# Allegro board SDHCAL_DAQ_2V0.brd
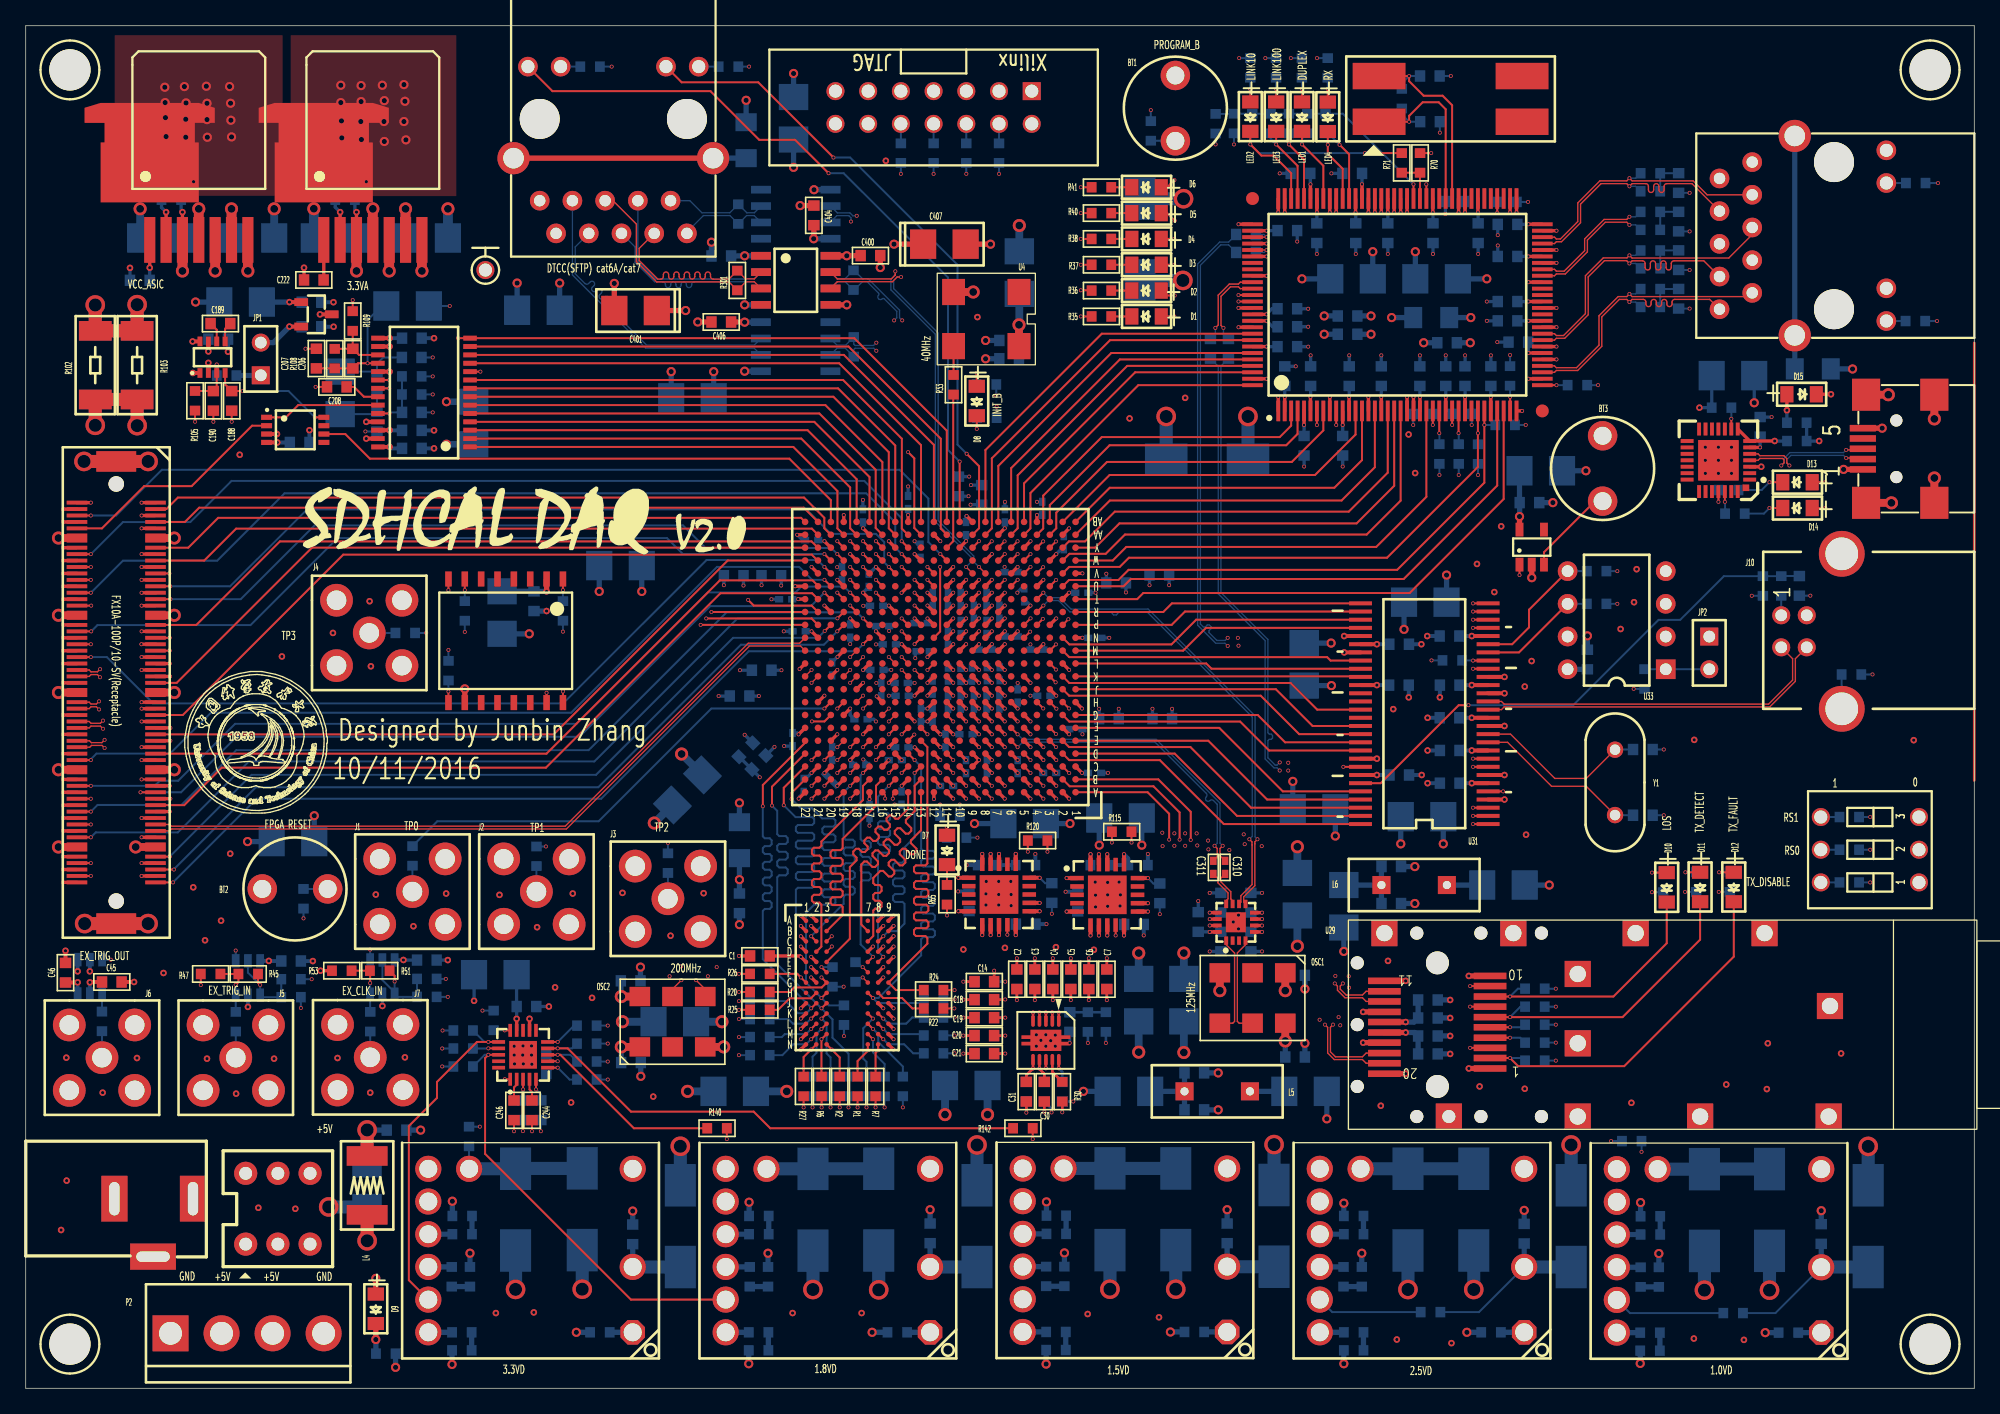
[diagram p0: board, top side]
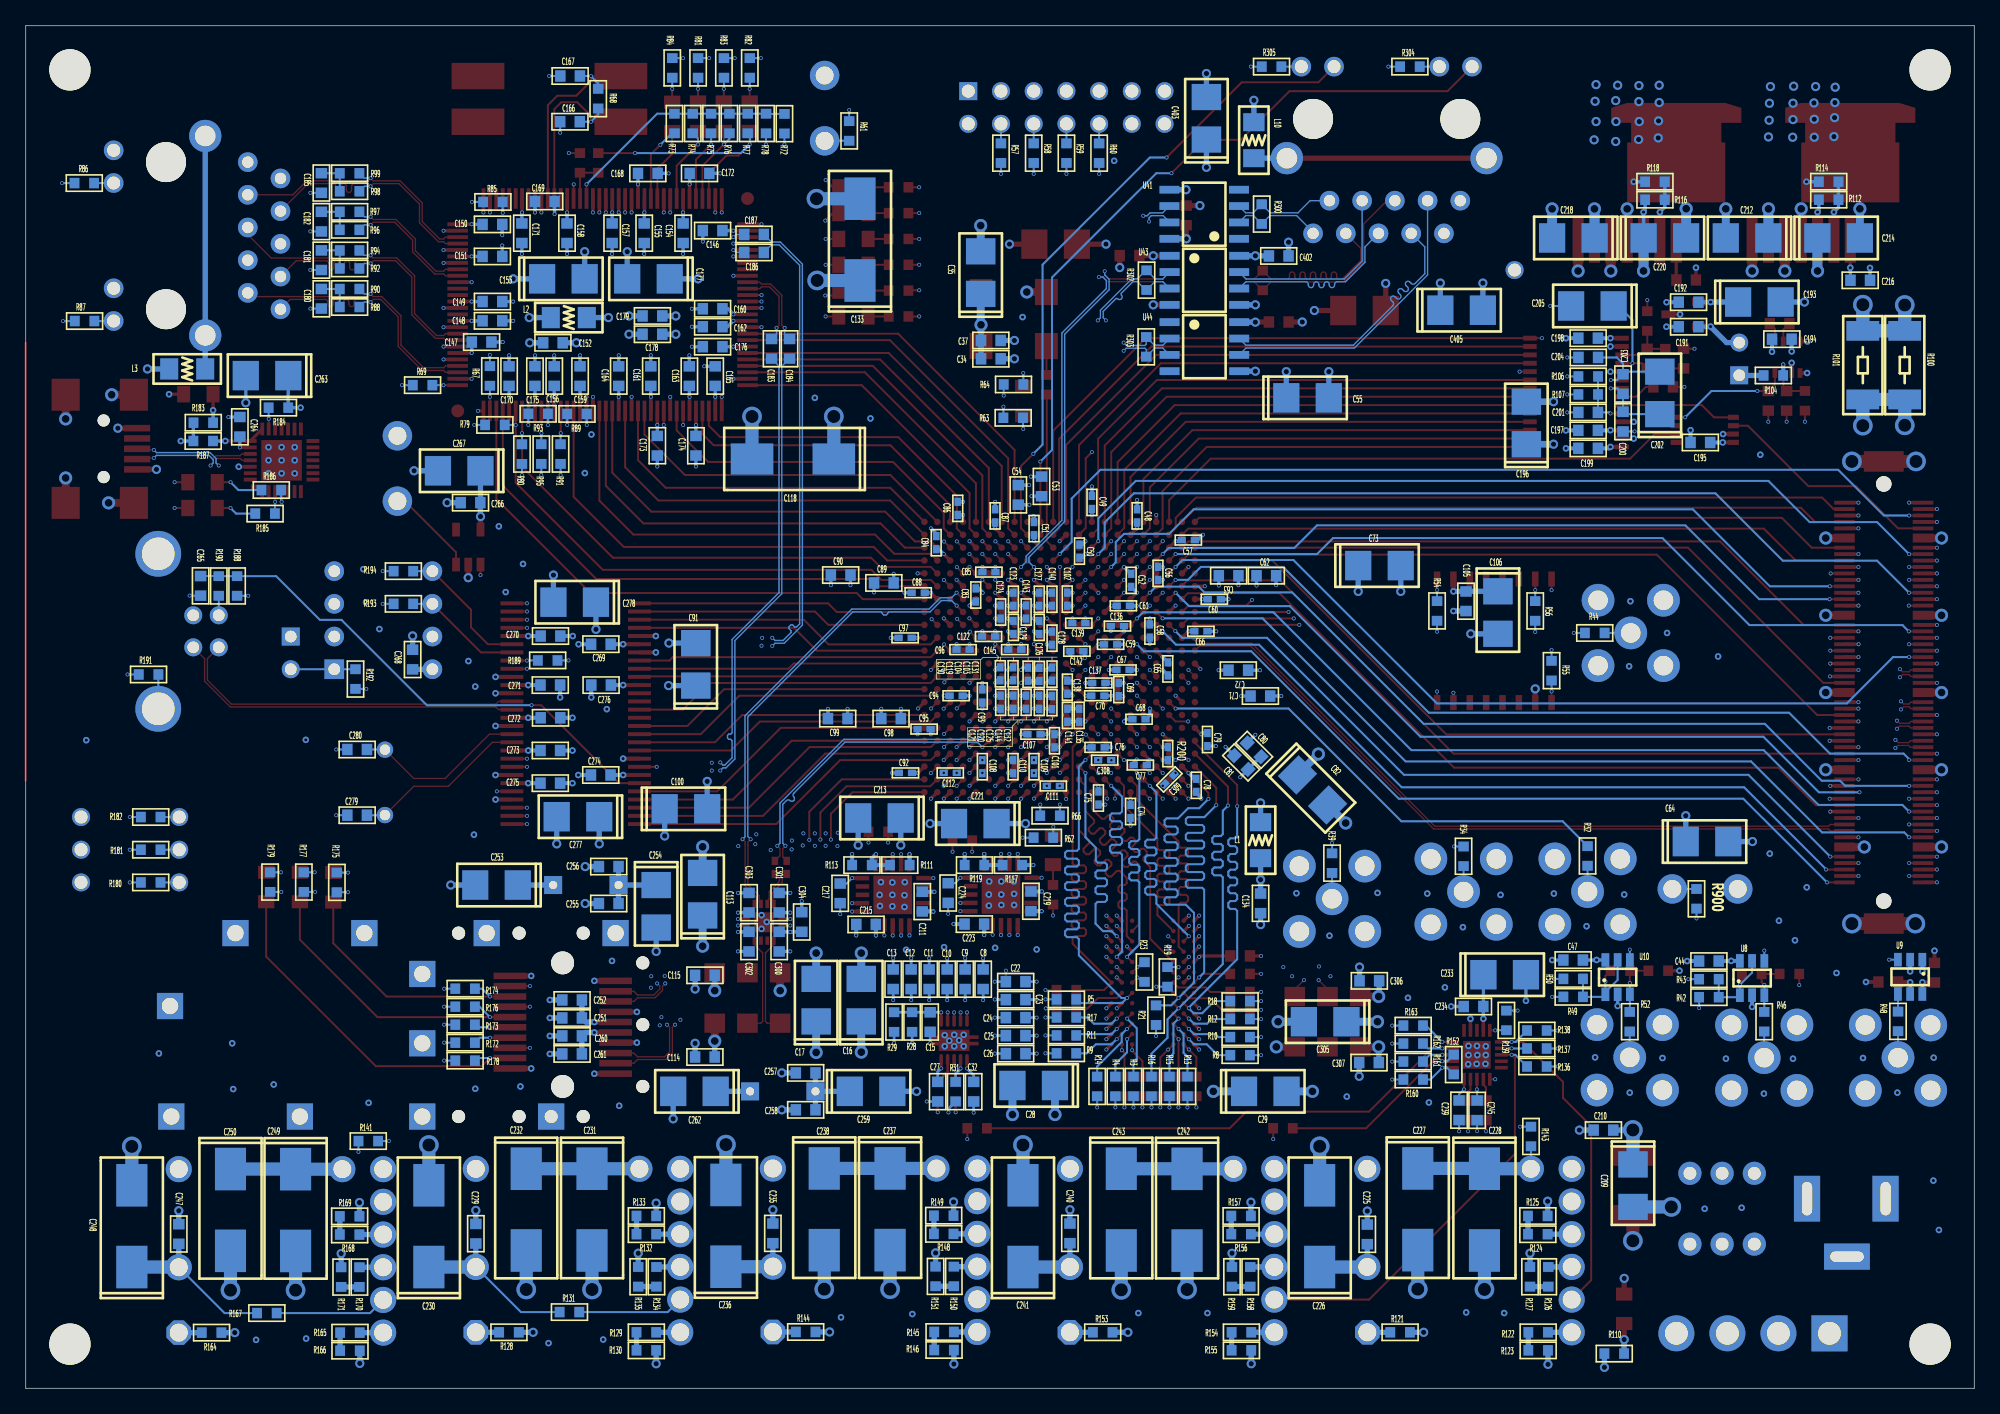
[diagram p1: board, bottom side, seen from below]

Outline 151.28 x 105.84 mm; copper layers: TOP, GND1, POWER1, SIG1, GND2, POWER2, SIG2, POWER3, GND3, BOTTOM. Coordinates in mm from the lower left corner of the outline.
Outline path: 0,105.84 0,0 151.28,0 151.28,105.84 0,105.84

## Design rules (mm)
net group CK_5: nets CK_5N CK_5P
net group CK_40: nets CK_40N CK_40P
net group CLK_125M: nets CLK_125M_N CLK_125M_P
net group CLK_200M: nets CLK_200M_N CLK_200M_P
net group CLKLINE: nets DDR3_CK DDR3_DQS
net group DP2: nets N18412 N18416
net group DP3: nets N18388 N18400
net group DP4: nets N16860005 N16860014
net group DP5: nets XTALIN XTALOUT
net group DP6: nets N02792 N02796
net group DP7: nets N00321 N00325
net group DP12: nets N16839379 N16839380
net group DP13: nets N16859991 N16859996
net group DP14: nets N16859977 N16859986
net group DP15: nets N16859959 N16859968
net group DTCC_CLK: nets DTCC_CLK_N DTCC_CLK_P
net group DTCC_CLKB: nets DTCC_CLKB_N DTCC_CLKB_P
net group DTCC_DATA: nets DTCC_DATA_N DTCC_DATA_P
net group DTCC_TRG: nets DTCC_TRG_N DTCC_TRG_P
net group PHY_MDI_0: nets PHY_MDI_0_N PHY_MDI_0_P
net group PHY_MDI_1: nets PHY_MDI_1_N PHY_MDI_1_P
net group PHY_MDI_2: nets PHY_MDI_2_N PHY_MDI_2_P
net group PHY_MDI_3: nets PHY_MDI_3_N PHY_MDI_3_P
net group RAZ_CHN: nets RAZ_CHNN RAZ_CHNP
net group SFP_CLK: nets SFP_CLK_N SFP_CLK_P
net group SFP_RX: nets SFP_RXN SFP_RXP
net group SFP_TX: nets SFP_TXN SFP_TXP
net group SGMII_RX: nets SGMII_RX+ SGMII_RX-
net group SGMII_TX: nets SGMII_TX+ SGMII_TX-
net group SPARE_DIFF: nets SPARE2 SPARE3
net group SPF_CLK_1: nets N16928130 N16928133
net group VAL_EVT: nets VAL_EVTN VAL_EVTP
net group ADDRCNTRL: nets DDR3_A0 DDR3_A1 DDR3_A2 DDR3_A3 DDR3_A4 DDR3_A5 DDR3_A6 DDR3_A7 DDR3_A8 DDR3_A9 DDR3_A10 DDR3_A11 DDR3_A12 DDR3_A13 DDR3_A14 DDR3_BA0 DDR3_BA1 DDR3_BA2 DDR3_CAS# DDR3_CK# DDR3_CKE DDR3_ODT DDR3_RAS# DDR3_RESET# DDR3_WE#
net group BYTELANE: nets DDR3_DM DDR3_DQ0 DDR3_DQ1 DDR3_DQ2 DDR3_DQ3 DDR3_DQ4 DDR3_DQ5 DDR3_DQ6 DDR3_DQ7 DDR3_DQS#
net group PHY_RXD: nets PHY_RXD0 PHY_RXD1 PHY_RXD2 PHY_RXD3 PHY_RXD4 PHY_RXD5 PHY_RXD6 PHY_RXD7
net group PHY_TXD: nets PHY_TXD0 PHY_TXD1 PHY_TXD2 PHY_TXD3 PHY_TXD4 PHY_TXD5 PHY_TXD6 PHY_TXD7

## Placement (name value [footprint] x y rotation side)
BT1  Button  [INDC2-200-M]  89.26 99.44 270 top
BT2  Button  [INDC2-200-M]  20.9 38.79 180 top
BT3  Button  [INDC2-200-M]  122.43 71.45 90 top
C1  0.1u  [SC0603]  57 33.58 0 top
C2  0.1u  [SC0603]  76.95 31.77 90 top
C3  0.1u  [SC0603]  78.35 31.77 90 top
C4  0.1u  [SC0603]  79.74 31.77 90 top
C5  0.1u  [SC0603]  81.14 31.77 90 top
C6  0.1u  [SC0603]  82.54 31.77 90 top
C7  0.1u  [SC0603]  83.93 31.77 90 top
C8  0.1u  [SC0603]  76.95 31.77 90 bottom
C9  0.1u  [SC0603]  78.35 31.77 90 bottom
C10  0.1u  [SC0603]  79.74 31.77 90 bottom
C11  0.1u  [SC0603]  81.14 31.77 90 bottom
C12  0.1u  [SC0603]  82.54 31.77 90 bottom
C13  0.1u  [SC0603]  83.93 31.77 90 bottom
C14  0.1u  [SC0603]  74.42 31.58 180 top
C15  0.01u  [SC0603]  81.06 28.45 90 bottom
C16  10u  [STC3528]  86.41 30.15 90 bottom
C17  10u  [STC3528]  89.92 30.15 90 bottom
C18  0.1u  [SC0603]  74.42 30.19 180 top
C19  0.1u  [SC0603]  74.42 28.79 180 top
C20  0.1u  [SC0603]  74.42 27.39 180 top
C21  0.1u  [SC0603]  74.42 26 180 top
C22  0.1u  [SC0603]  74.42 31.58 180 bottom
C23  0.1u  [SC0603]  74.42 30.19 180 bottom
C24  0.1u  [SC0603]  74.42 28.79 180 bottom
C25  0.1u  [SC0603]  74.42 27.39 180 bottom
C26  0.1u  [SC0603]  74.42 26 180 bottom
C27  4.7u  [SC0603]  80.48 23.04 270 bottom
C28  10u  [STC3528]  73.02 23.52 0 bottom
C29  10u  [STC3528]  55.04 23.06 180 bottom
C30  4.7u  [SC0603]  79.08 23.04 270 top
C31  0.1u  [SC0603]  77.69 23.04 270 top
C32  4.7u  [SC0603]  77.69 23.04 270 bottom
C34  1u  [SC0603]  76.35 79.97 180 bottom
C35  10u  [STC3528]  77.14 86.66 90 bottom
C37  0.1u  [SC0603]  76.35 81.39 180 bottom
C44  0.1u  [SC0603]  20.6 33.19 180 bottom
C45  0.1u  [SC0603]  6.68 31.56 180 top
C46  0.1u  [SC0603]  3.09 32.28 90 top
C47  0.1u  [SC0603]  31.14 33.26 180 bottom
C48  0.47u  [SC0402]  65 67.77 90 bottom
C49  0.47u  [SC0402]  68.5 68.81 90 bottom
C50  0.47u  [SC0402]  69.47 65.03 90 bottom
C51  0.47u  [SC0402]  73 66.78 90 bottom
C52  0.47u  [SC0402]  65.46 62.76 270 bottom
C53  4.7u  [SC0603]  72.42 70.06 90 bottom
C54  4.7u  [SC0603]  74.22 69.4 90 bottom
C55  47u  [STC3528]  51.76 76.94 180 bottom
C56  0.47u  [SC0402]  63.37 63.3 90 bottom
C57  0.47u  [SC0402]  61.02 65.89 180 bottom
C58  0.47u  [SC0402]  64.01 58.82 270 bottom
C59  0.47u  [SC0402]  67.05 57.78 180 bottom
C60  0.47u  [SC0402]  59 61.29 180 bottom
C61  0.47u  [SC0402]  66.06 60.78 180 bottom
C62  4.7u  [SC0603]  54.96 63.12 180 bottom
C63  4.7u  [SC0603]  57.89 63.12 0 bottom
C64  47u  [STC3528]  20.75 42.47 180 bottom
C65  0.47u  [SC0402]  62.61 55.88 90 bottom
C66  0.47u  [SC0402]  60.05 58.8 180 bottom
C67  0.47u  [SC0402]  66.09 55.8 0 bottom
C68  0.47u  [SC0402]  64.85 51.97 0 bottom
C69  0.47u  [SC0402]  66.42 54.28 90 bottom
C70  0.47u  [SC0402]  68.05 53.8 180 bottom
C71  4.7u  [SC0603]  55.42 53.77 180 bottom
C72  4.7u  [SC0603]  57.14 55.78 180 bottom
C73  47u  [STC3528]  46.18 63.91 180 bottom
C74  0.47u  [SC0402]  65.51 44.81 270 bottom
C75  0.47u  [SC0402]  68 45.85 270 bottom
C76  0.47u  [SC0402]  68.02 49.78 0 bottom
C77  0.47u  [SC0402]  64.74 48.41 0 bottom
C78  0.47u  [SC0402]  60.4 46.84 270 bottom
C79  0.47u  [SC0402]  59.54 50.39 270 bottom
C80  4.7u  [SC0603]  55.91 49.59 225 bottom
C81  4.7u  [SC0603]  56.92 48.61 225 bottom
C82  47u  [STC3528]  51.37 46.48 225 bottom
C83  0.47u  [SC0402]  77.52 61.62 90 bottom
C84  0.47u  [SC0402]  80.59 65.68 90 bottom
C85  0.47u  [SC0402]  76.5 63.4 180 bottom
C86  0.47u  [SC0402]  78.92 68.35 90 bottom
C87  0.47u  [SC0402]  76.02 67.77 90 bottom
C88  0.47u  [SC0402]  81.99 61.8 0 bottom
C89  4.7u  [SC0603]  84.66 62.56 0 bottom
C90  4.7u  [SC0603]  88.01 63.17 0 bottom
C91  47u  [STC3528]  99.26 56.24 90 bottom
C92  0.47u  [SC0402]  82.98 47.8 0 bottom
C93  0.47u  [SC0402]  77.01 53.77 90 bottom
C94  0.47u  [SC0402]  79.04 53.8 180 bottom
C95  0.47u  [SC0402]  81.53 51.21 0 bottom
C96  0.47u  [SC0402]  78.51 57.38 180 bottom
C97  0.47u  [SC0402]  83.01 58.29 0 bottom
C98  4.7u  [SC0603]  84.1 52.02 0 bottom
C99  4.7u  [SC0603]  88.24 52.02 0 bottom
C100  47u  [STC3528]  100.03 45.01 180 bottom
C101  0.47u  [SC0402]  71.41 50.3 270 bottom
C102  47u  [SC0402]  70.42 61.3 270 bottom
C103  0.1u  [SC0402]  72.58 55.45 90 bottom
C104  0.47u  [SC0402]  73.47 55.47 90 bottom
C105  0.1u  [SC0603]  39.46 61.14 270 bottom
C106  10uF  [STC3528]  36.98 60.26 270 bottom
C107  4.7u  [SC0402]  73 50.8 180 bottom
C108  0.1u  [SC0402]  77.01 48.29 270 bottom
C109  0.1u  [SC0402]  73 48.29 270 bottom
C110  4.7u  [SC0402]  74.63 48.29 90 bottom
C111  0.1u  [SC0402]  71.5 46.79 180 bottom
C112  0.1u  [SC0402]  79.5 47.8 0 bottom
C113  10u  [STC3528]  98.73 38.38 90 bottom
C114  0.01u  [SC0603]  98.55 25.73 180 bottom
C115  0.1u  [SC0603]  98.55 32.08 180 bottom
C118  300u  [STC7343]  91.72 72.19 0 bottom
C119  4.7u  [SC0402]  74.63 55.5 90 bottom
C120  4.7u  [SC0402]  74.6 53.29 90 bottom
C121  4.7u  [SC0402]  75.59 53.29 270 bottom
C122  4.7u  [SC0402]  76.53 58.39 0 bottom
C123  4.7u  [SC0402]  74.6 61.29 270 bottom
C124  4.7u  [SC0402]  75.59 60.3 270 bottom
C125  0.47u  [SC0402]  73.61 53.29 270 bottom
C126  0.47u  [SC0402]  72.59 59.11 270 bottom
C127  0.47u  [SC0402]  72.59 61.29 270 bottom
C128  0.47u  [SC0402]  71.6 58.27 270 bottom
C129  0.47u  [SC0402]  74.6 59.11 270 bottom
C130  0.47u  [SC0402]  75.62 55.5 270 bottom
C131  0.47u  [SC0402]  71.6 55.47 270 bottom
C132  0.47u  [SC0402]  71.6 53.26 270 bottom
C133  100u  [STC7343]  86.51 89.23 90 bottom
C134  47u  [SC0603]  55.41 37.67 270 bottom
C135  4.7u  [SC0402]  69.49 52.27 270 bottom
C136  4.7u  [SC0402]  66.52 59.21 180 bottom
C137  4.7u  [SC0402]  67.97 54.79 180 bottom
C138  0.47u  [SC0402]  70.41 54.46 270 bottom
C139  0.47u  [SC0402]  69.52 59.44 180 bottom
C140  0.47u  [SC0402]  71.6 61.29 90 bottom
C141  0.47u  [SC0402]  70.41 52.27 270 bottom
C142  0.47u  [SC0402]  69.67 57.25 180 bottom
C143  0.47u  [SC0402]  73.61 60.3 270 bottom
C144  0.47u  [SC0402]  72.59 53.28 90 bottom
C145  0.47u  [SC0402]  74.5 57.38 180 bottom
C146  0.1u  [SC0603]  97.95 89.93 0 bottom
C147  0.1u  [SC0603]  115.89 81.27 180 bottom
C148  0.1u  [SC0603]  115.05 82.92 180 bottom
C149  0.1u  [SC0603]  115.05 84.42 180 bottom
C150  0.1u  [SC0603]  115.05 90.41 180 bottom
C151  0.1u  [SC0603]  115.05 87.92 180 bottom
C152  1n  [SC0603]  110.35 81.22 180 bottom
C153  10u  [STC3528]  109.54 86.18 180 bottom
C154  0.1u  [SC0603]  100.24 89.73 270 bottom
C155  0.1u  [SC0603]  103.26 89.73 270 bottom
C156  0.1u  [SC0603]  110.25 78.62 90 bottom
C157  0.1u  [SC0603]  105.75 89.73 270 bottom
C158  0.1u  [SC0603]  109.26 89.73 270 bottom
C159  0.1u  [SC0603]  108.24 78.62 90 bottom
C160  0.1u  [SC0603]  97.95 83.86 0 bottom
C161  0.1u  [SC0603]  102.76 78.62 90 bottom
C162  0.1u  [SC0603]  97.95 82.46 0 bottom
C163  0.1u  [SC0603]  99.76 78.62 90 bottom
C164  0.1u  [SC0603]  105.24 78.62 90 bottom
C165  0.1u  [SC0603]  97.75 78.62 90 bottom
C166  22p  [SC0603]  109.03 98.39 0 bottom
C167  22p  [SC0603]  109.02 101.94 0 bottom
C168  0.1u  [SC0603]  102.99 94.37 180 bottom
C169  0.1u  [SC0603]  110.99 92.19 180 bottom
C170  0.1u  [SC0603]  113.75 78.62 90 bottom
C171  0.1u  [SC0603]  112.76 89.73 270 bottom
C172  0.1u  [SC0603]  98.97 94.37 180 bottom
C173  0.1u  [SC0603]  102.25 73.22 270 bottom
C174  0.1u  [SC0603]  99.25 73.22 270 bottom
C175  0.1u  [SC0603]  111.75 78.62 90 bottom
C176  0.1u  [SC0603]  97.95 80.91 0 bottom
C177  10u  [STC3528]  102.93 86.18 0 bottom
C178  1n  [SC0603]  102.63 81.88 0 bottom
C179  1n  [SC0603]  102.63 83.3 0 bottom
C180  0.01u  [SC0603]  128.33 84.63 270 bottom
C181  0.01u  [SC0603]  128.33 87.63 270 bottom
C182  0.01u  [SC0603]  128.33 90.63 270 bottom
C183  0.01u  [SC0603]  93.38 80.75 270 bottom
C184  0.01u  [SC0603]  91.98 80.75 270 bottom
C185  0.01u  [SC0603]  128.33 93.62 270 bottom
C186  0.01u  [SC0603]  94.74 88.23 180 bottom
C187  0.01u  [SC0603]  94.74 89.63 180 bottom
C188  39n  [SC0603]  15.99 76.7 270 top
C189  680p  [SC0603]  15.11 82.7 0 top
C190  0.1u  [SC0603]  14.57 76.7 270 top
C191  0.1u  [SC0603]  22.18 82.46 0 bottom
C192  0.47u  [SC0603]  22.18 84.37 0 bottom
C193  10u  [STC3528]  16.68 84.38 180 bottom
C194  0.1u  [SC0603]  14.94 81.5 0 bottom
C195  0.1u  [SC0603]  21.27 73.47 0 bottom
C196  10u  [STC3528]  34.77 74.99 90 bottom
C197  0.1u  [SC0603]  29.98 74.41 0 bottom
C198  0.1u  [SC0603]  29.98 81.57 0 bottom
C199  0.1u  [SC0603]  29.98 73.01 0 bottom
C200  0.1u  [SC0603]  27.27 75.09 90 bottom
C201  0.1u  [SC0603]  29.98 75.81 0 bottom
C202  10u  [STC3528]  24.41 77.32 90 bottom
C203  0.1u  [SC0603]  27.27 78.01 90 bottom
C204  0.1u  [SC0603]  29.97 80.07 180 bottom
C205  10u  [STC3528]  29.65 84.07 0 bottom
C206  x  [SC0603]  25.4 79.98 90 top
C207  0.1u  [SC0603]  22.57 79.99 90 top
C208  0.1u  [SC0603]  24.15 77.79 180 top
C209  10u  [STC3528]  26.49 15.74 270 bottom
C210  0.1u  [SC0603]  28.79 20.05 0 bottom
C211  1u  [SC0603]  81.67 37.81 90 bottom
C212  10u  [STC3528]  17.64 89.36 0 bottom
C213  10u  [STC3528]  85 44.3 0 bottom
C214  10u  [STC3528]  10.53 89.36 180 bottom
C215  1u  [SC0603]  86.04 36.03 0 bottom
C216  470p  [SC0603]  8.85 86.07 180 bottom
C217  470p  [SC0603]  88.05 38.44 270 bottom
C218  10u  [STC3528]  31.13 89.36 0 bottom
C219  1u  [SC0603]  73.24 37.83 90 bottom
C220  10u  [STC3528]  24.02 89.36 180 bottom
C221  10u  [STC3528]  77.56 43.87 0 bottom
C222  470p  [SC0603]  22.37 86.09 180 top
C223  1u  [SC0603]  77.63 36.06 0 bottom
C224  1n  [SC0603]  79.67 38.47 270 bottom
C225  22u  [SC0603]  47.12 11.96 90 bottom
C226  330u  [STC7343]  50.82 12.59 90 bottom
C227  100u  [STC7343]  43.21 13.9 270 bottom
C228  150u  [STC7343]  38.03 13.88 270 bottom
C229  22u  [SC0603]  116.34 12.01 90 bottom
C230  330u  [STC7343]  119.98 12.59 90 bottom
C231  100u  [STC7343]  107.31 13.88 270 bottom
C232  150u  [STC7343]  112.43 13.88 270 bottom
C233  10u  [STC3528]  36.46 32.13 180 bottom
C234  0.1u  [SC0603]  38.88 29.65 0 bottom
C235  22u  [SC0603]  93.28 12.03 90 bottom
C236  330u  [STC7343]  96.92 12.62 90 bottom
C237  100u  [STC7343]  84.18 13.9 270 bottom
C238  150u  [STC7343]  89.29 13.9 270 bottom
C239  22n  [SC0603]  40 21.6 270 bottom
C240  22u  [SC0603]  70.21 12.03 90 bottom
C241  330u  [STC7343]  73.86 12.59 90 bottom
C242  100u  [STC7343]  61.12 13.87 270 bottom
C243  150u  [STC7343]  66.22 13.88 270 bottom
C244  22n  [SC0603]  39.3 21.59 270 top
C245  22n  [SC0603]  38.6 21.59 270 bottom
C246  22n  [SC0603]  37.91 21.59 270 top
C247  22u  [SC0603]  139.4 11.98 90 bottom
C248  330u  [STC7343]  143.05 12.59 90 bottom
C249  100u  [STC7343]  130.33 13.84 270 bottom
C250  150u  [STC7343]  135.39 13.85 270 bottom
C251  0.1u  [SC0603]  108.86 28.77 0 bottom
C252  0.1u  [SC0603]  108.86 30.16 0 bottom
C253  10u  [STC3528]  114.73 39.09 0 bottom
C254  10u  [STC3528]  102.34 37.44 270 bottom
C255  0.1u  [SC0603]  106.02 37.66 0 bottom
C256  0.1u  [SC0603]  106.02 40.53 0 bottom
C257  0.1u  [SC0603]  90.73 24.5 0 bottom
C258  0.1u  [SC0603]  90.73 21.63 0 bottom
C259  10u  [STC3528]  85.65 23.06 180 bottom
C260  0.1u  [SC0603]  108.86 27.37 0 bottom
C261  0.1u  [SC0603]  108.86 25.97 0 bottom
C262  10u  [STC3528]  99.36 23.06 0 bottom
C263  10u  [STC3528]  132.55 78.66 0 bottom
C264  1u  [SC0603]  134.66 74.69 90 bottom
C265  0.1u  [SC0603]  137.71 62.33 90 bottom
C266  0.1u  [SC0603]  116.75 68.8 0 bottom
C267  10u  [STC3528]  117.63 71.27 0 bottom
C268  0.1u  [SC0603]  121.25 56.61 270 bottom
C269  0.1u  [SC0603]  106.63 57.8 0 bottom
C270  0.1u  [SC0603]  110.54 58.43 180 bottom
C271  0.1u  [SC0603]  110.56 54.62 180 bottom
C272  0.1u  [SC0603]  110.54 52.08 180 bottom
C273  0.1u  [SC0603]  110.56 49.54 180 bottom
C274  0.1u  [SC0603]  106.64 47.64 0 bottom
C275  0.1u  [SC0603]  110.56 47 180 bottom
C276  0.1u  [SC0603]  106.61 54.62 0 bottom
C277  10u  [STC3528]  108.41 44.4 0 bottom
C278  10u  [STC3528]  108.66 61.06 0 bottom
C279  12p  [SC0603]  125.55 44.51 180 bottom
C280  12p  [SC0603]  125.55 49.62 180 bottom
C300  0.01u  [SC0603]  92.79 34.7 270 bottom
C301  0.01u  [SC0603]  92.79 37.72 90 bottom
C302  0.01u  [SC0603]  95.12 34.7 270 bottom
C303  0.01u  [SC0603]  95.12 37.72 90 bottom
C304  0.1u  [SC0603]  91.03 36.22 90 bottom
C305  10u  [STC3528]  50.39 28.47 0 bottom
C306  0.1u  [SC0603]  46.96 31.65 180 bottom
C307  0.01u  [SC0603]  46.99 25.3 180 bottom
C308  0.01u  [SC0402]  67.51 48.79 180 bottom
C309  0.01u  [SC0402]  62.49 47.3 315 bottom
C310  0.1u  [SC0402]  93.12 40.46 270 top
C311  0.1u  [SC0402]  92.2 40.46 270 top
C400  0.1u  [SC0603]  65.58 87.99 0 top
C401  10u  [STC3528]  47.35 83.72 180 top
C402  0.1u  [SC0603]  54 87.96 180 bottom
C403  10u  [STC3528]  59.61 98.65 90 bottom
C404  0.1u  [SC0603]  61.19 91.11 90 top
C405  10u  [STC3528]  39.8 83.74 180 bottom
C406  0.1u  [SC0603]  54 82.83 180 top
C407  10u  [STC3528]  71.32 88.87 0 top
D1  LED  [SD0805]  87.02 83.26 180 top
D2  LED  [SD0805]  87.02 85.27 180 top
D3  LED  [SD0805]  87.02 87.27 180 top
D4  LED  [SD0805]  87.02 89.28 180 top
D5  LED  [SD0805]  87.02 91.29 180 top
D6  LED  [SD0805]  87.02 93.29 180 top
D7  LED  [SD0805]  71.53 41.82 270 top
D8  LED  [SD0805]  73.84 76.69 270 top
D9  Green  [SD0805]  27.18 6.17 270 top
D10  LED  [SD0805]  127.41 38.91 270 top
D11  LED  [SD0805]  130 38.94 270 top
D12  LED  [SD0805]  132.61 38.94 270 top
D13  LED  [SD0805]  137.56 70.38 180 top
D14  LED  [SD0805]  137.56 68.38 180 top
D15  LED  [SD0805]  137.88 77.22 0 top
J1  LEMO  [CON-BNC-S-T]  30.02 38.58 0 top
J2  LEMO  [CON-BNC-S-T]  39.65 38.58 0 top
J3  LEMO  [CON-BNC-S-T]  49.86 38.02 0 top
J4  LEMO  [CON-BNC-S-T]  26.67 58.67 0 top
J5  LEMO  [CON-BNC-S-T]  16.31 25.68 270 top
J6  LEMO  [CON-BNC-S-T]  5.92 25.68 270 top
J7  LEMO  [CON-BNC-S-T]  26.75 25.71 270 top
J8  JTAG-14pin  [JTAG-14P]  83.24 103.99 180 top
J9  MINI USB  [CONN_USB_B]  146.68 72.98 90 top
J10  USB_B  [MJ4-SR-1]  136.3 60.05 90 top
JP1  Jump wire  [SIP-2P]  18.25 79.96 90 top
JP2  Jump wire  [SIP-2P]  130.71 57.12 270 top
L1  bead  [SL1206]  55.41 42.57 90 bottom
L2  FERRITE-220  [SL1206]  109.12 83.17 180 bottom
L3  FERRITE-220  [SL1206]  138.75 79.18 0 bottom
L4  10uH  [SL1812]  26.5 15.76 90 top
L5  39mH  [BL02RN2R1M2B]  92.51 23.06 0 top
L6  39mH  [BL02RN2R1M2B]  107.8 39.09 0 top
L10  FERRITE-220  [SL1206]  55.93 96.95 90 bottom
LED1  Green  [SD0805]  99.09 98.78 270 top
LED2  Green  [SD0805]  95.08 98.78 270 top
LED3  Green  [SD0805]  97.08 98.78 270 top
LED4  Green  [SD0805]  101.09 98.77 270 top
NOREF  -  []  137.13 55.63 0 top
NOREF#2  -  []  67.59 84 0 top
NOREF#3  -  []  91.26 46.58 0 top
NOREF#4  -  []  123.62 87.81 0 top
NOREF#5  -  []  123.93 87.58 0 top
NOREF#6  -  []  102.84 25.55 0 top
NOREF#7  -  []  19.96 63.53 0 top
NOREF#8  -  []  42.44 88.29 0 top
NOREF#9  -  []  101.04 33.07 0 top
NOREF#10  -  []  91.69 46.48 0 top
NOREF#11  -  []  0 0 90 top
NOREF#12  -  []  6.3 50.16 0 top
NOREF#13  -  []  11.89 44.65 0 top
NOREF#14  -  []  140.59 72.47 0 top
NOREF#15  -  []  95.43 45.54 0 top
NOREF#16  -  [unnamed#2]  3.43 102.41 0 top
NOREF#17  -  [unnamed#2]  147.85 3.43 0 top
NOREF#18  -  []  7.11 52.91 0 top
NOREF#19  -  []  47.55 90.91 0 top
NOREF#20  -  []  67.61 78.56 0 top
NOREF#21  -  []  90.98 63.7 0 top
NOREF#22  -  []  65.66 85.42 0 top
NOREF#23  -  []  52.32 32.82 0 top
NOREF#24  -  []  7.62 51.1 0 top
NOREF#25  -  []  92.63 58.09 0 top
NOREF#26  -  []  7.62 55.68 0 top
NOREF#27  -  []  124.03 84.58 0 top
NOREF#28  -  [unnamed#2]  3.43 3.43 0 top
NOREF#29  -  []  53.62 86.18 0 top
NOREF#30  -  []  95.17 45.92 0 top
NOREF#31  -  []  94.11 30.25 0 top
NOREF#32  -  []  64.36 32.21 0 top
NOREF#33  -  []  66.83 74.68 0 top
NOREF#34  -  []  7.11 49.94 0 top
NOREF#35  -  []  122.86 93.57 0 top
NOREF#36  -  []  101.09 30.73 0 top
NOREF#37  -  []  51.71 32.54 0 top
NOREF#38  -  [unnamed#2]  147.85 102.41 0 top
NOREF#39  -  []  47.09 88.87 0 top
NOREF#40  -  []  140.11 72.66 0 top
NOREF#41  -  []  93.85 29.95 0 top
NOREF#42  -  []  62.05 34.9 0 top
NOREF#43  -  []  103.17 25.76 0 top
NOREF#44  -  []  12.06 43.66 0 top
NOREF#45  -  []  123.95 84.81 0 top
NOREF#46  -  []  65.46 84.61 0 top
NOREF#47  -  []  91.21 63.17 0 top
NOREF#48  -  []  67.03 84.23 0 top
NOREF#49  -  []  123.27 90.81 0 top
NOREF#50  -  []  67.87 78.79 0 top
NOREF#51  -  []  49.57 64.53 0 top
NOREF#52  -  []  122.45 93.8 0 top
NOREF#53  -  []  7.44 51.61 0 top
NOREF#54  -  []  67.03 75.29 0 top
NOREF#55  -  []  51.49 85.95 0 top
NOREF#56  -  []  100.89 30.53 0 top
NOREF#57  -  []  42.67 87.1 0 top
NOREF#58  -  []  61.9 34.75 0 top
NOREF#59  -  []  11.58 43.51 0 top
NOREF#60  -  []  7.47 55.45 0 top
NOREF#61  -  []  69.34 83.16 0 top
NOREF#62  -  []  96.44 52.37 0 top
NOREF#63  -  []  64.59 32.44 0 top
NOREF#64  -  []  123.6 90.58 0 top
NOREF#65  -  []  69.98 82.83 0 top
NOREF#66  -  []  164.72 5.16 0 top
NOREF#67  -  []  101.27 32.59 0 top
NOREF#68  -  []  0 105.84 0 top
NOREF#69  -  []  92.58 57.89 0 top
NOREF#70  -  []  96.24 51.94 0 top
NOREF#71  -  []  6.81 53.16 0 top
NOREF#72  -  []  137.39 55.17 0 top
OSC1  SiT9102AI-283N25E125.000  [XO75L]  95.25 30.31 180 top
OSC2  SiT9102AI-283N25E200.000  [XO75L]  50.22 28.47 0 top
P1  -  [RJ45-HFJ11-1G01E-L12RL]  140.39 95.25 90 top
P2  Pin 4  [SIP-4P-156]  17.18 4.27 0 top
P4  -  [RJ45-HFJ11-1G01E-L12RL]  39.9 98.6 180 top
R1  50  [SR0603]  64.58 23.44 270 top
R2  50  [SR0603]  63.2 23.45 270 top
R3  50  [SR0603]  65.28 23.45 270 bottom
R4  50  [SR0603]  66.68 23.44 270 bottom
R5  50  [SR0603]  70.48 30.21 0 bottom
R6  50  [SR0603]  61.79 23.44 270 top
R7  50  [SR0603]  65.98 23.44 270 top
R8  50  [SR0603]  57 25.87 180 bottom
R9  50  [SR0603]  70.48 26.02 0 bottom
R10  50  [SR0603]  57 27.28 180 bottom
R11  50  [SR0603]  70.48 27.41 0 bottom
R12  50  [SR0603]  57 28.68 180 bottom
R13  50  [SR0603]  61.09 23.45 270 bottom
R14  50  [SR0603]  68.1 23.45 270 bottom
R15  50  [SR0603]  62.48 23.45 270 bottom
R16  50  [SR0603]  63.88 23.45 270 bottom
R17  50  [SR0603]  70.48 28.8 0 bottom
R18  50  [SR0603]  57 30.07 180 bottom
R19  50  [SR0603]  62.64 31.95 270 bottom
R20  50  [SR0603]  57 30.78 180 top
R21  50  [SR0603]  63.53 28.98 270 bottom
R22  240  [SR0603]  70.48 29.51 0 top
R23  100  [SR0603]  64.42 32.33 270 bottom
R24  4.7k  [SR0603]  70.48 30.93 0 top
R25  100  [SR0603]  57 29.4 180 top
R26  4.7k  [SR0603]  57 32.19 180 top
R27  4.7k  [SR0603]  60.39 23.44 270 top
R28  10k  [SR0603]  82.47 28.45 90 bottom
R29  10k  [SR0603]  83.86 28.45 90 bottom
R30  100k  [SR0603]  80.48 23.04 90 top
R31  0  [SR0603]  79.09 23.04 90 bottom
R32  50  [SR0603]  30.02 41.35 270 bottom
R33  33  [SR0603]  72.03 77.95 90 top
R34  50  [SR0603]  39.65 41.33 270 bottom
R35  270  [SR0603]  83.52 83.26 0 top
R36  270  [SR0603]  83.52 85.27 0 top
R37  270  [SR0603]  83.52 87.27 0 top
R38  270  [SR0603]  83.52 89.28 0 top
R39  50  [SR0603]  49.86 40.79 270 bottom
R40  270  [SR0603]  83.52 91.29 0 top
R41  270  [SR0603]  83.52 93.29 0 top
R42  0  [SR0603]  20.6 30.38 180 bottom
R43  0  [SR0603]  20.6 31.78 0 bottom
R44  50  [SR0603]  29.46 58.67 180 bottom
R45  10k  [SR0603]  17.27 32.18 0 top
R46  50  [SR0603]  16.31 28.47 90 bottom
R47  option  [SR0603]  14.35 32.18 180 top
R48  50  [SR0603]  5.92 28.5 270 bottom
R49  0  [SR0603]  31.14 30.4 180 bottom
R50  0  [SR0603]  31.14 31.8 0 bottom
R51  10k  [SR0603]  27.48 32.44 0 top
R52  50  [SR0603]  26.75 28.47 90 bottom
R53  option  [SR0603]  24.54 32.44 180 top
R54  4.7k  [SR0603]  41.71 60.38 270 bottom
R55  4.7k  [SR0603]  32.82 55.74 90 bottom
R56  4.7k  [SR0603]  34.09 60.38 270 bottom
R57  33  [SR0603]  75.56 95.94 270 bottom
R58  33  [SR0603]  73.03 95.94 270 bottom
R59  33  [SR0603]  70.48 95.94 270 bottom
R60  33  [SR0603]  67.94 95.94 270 bottom
R61  4.7k  [SR0603]  87.35 97.67 270 bottom
R62  300  [SR0603]  72.27 42.77 180 bottom
R63  4.7k  [SR0603]  74.62 75.39 0 bottom
R64  300  [SR0603]  74.59 77.98 0 bottom
R65  220  [SR0603]  71.53 38.34 270 top
R66  100  [SR0603]  71.75 44.48 0 bottom
R67  4.7k  [SR0603]  115.24 78.64 90 bottom
R68  1M  [SR0603]  106.84 100.18 90 bottom
R69  5k 1%  [SR0603]  120.47 77.92 0 bottom
R70  0  [SR0603]  108.25 95.19 270 top
R71  0  [SR0603]  106.83 95.19 270 top
R72  0  [SR0603]  92.38 98.23 90 bottom
R73  0  [SR0603]  100.92 98.25 90 bottom
R74  0  [SR0603]  99.5 98.25 90 bottom
R75  0  [SR0603]  98.07 98.25 90 bottom
R76  0  [SR0603]  96.65 98.25 90 bottom
R77  0  [SR0603]  95.23 98.25 90 bottom
R78  0  [SR0603]  93.81 98.25 90 bottom
R79  4.7k  [SR0603]  114.86 74.83 180 bottom
R80  4.7k  [SR0603]  112.75 72.57 90 bottom
R81  300  [SR0603]  99.08 102.57 270 bottom
R82  300  [SR0603]  95.07 102.57 270 bottom
R83  300  [SR0603]  97.07 102.57 270 bottom
R84  300  [SR0603]  101.09 102.57 270 bottom
R85  4.7k  [SR0603]  115.01 92.16 180 bottom
R86  300  [SR0603]  146.74 93.62 0 bottom
R87  300  [SR0603]  146.71 82.9 0 bottom
R88  47,5%  [SR0603]  126.14 83.99 0 bottom
R89  4.7k,5%  [SR0603]  108.49 75.69 0 bottom
R90  47,5%  [SR0603]  126.14 85.39 0 bottom
R91  4.7k,5%  [SR0603]  109.76 72.57 90 bottom
R92  47,5%  [SR0603]  126.14 86.99 0 bottom
R93  4.7k,5%  [SR0603]  111.5 75.7 180 bottom
R94  47,5%  [SR0603]  126.14 88.39 0 bottom
R95  4.7k,5%  [SR0603]  111.26 72.57 90 bottom
R96  47,5%  [SR0603]  126.14 89.99 0 bottom
R97  47,5%  [SR0603]  126.14 91.39 0 bottom
R98  47,5%  [SR0603]  126.14 92.99 0 bottom
R99  47,5%  [SR0603]  126.14 94.38 0 bottom
R100  0.2  [SR2010]  5.4 79.48 90 bottom
R101  0.2  [SR2010]  8.65 79.48 90 bottom
R102  0.2  [SR2010]  5.4 79.48 90 top
R103  0.2  [SR2010]  8.65 79.48 90 top
R104  x  [SR0603]  15.6 78.67 0 bottom
R105  x  [SR0603]  13.14 76.71 90 top
R106  x  [SR0603]  29.97 78.6 180 bottom
R107  x  [SR0603]  29.97 77.2 0 bottom
R108  x  [SR0603]  23.99 79.98 90 top
R109  x  [SR0603]  25.39 82.91 90 top
R110  330  [SR0603]  27.95 2.69 0 bottom
R111  1.13k  [SR0603]  83.42 40.64 0 bottom
R112  3.57k  [SR0603]  11.3 92.33 180 bottom
R113  4.53k  [SR0603]  86.36 40.64 0 bottom
R114  1.15k  [SR0603]  11.3 93.73 0 bottom
R115  100k  [SR0603]  85.09 43.23 180 top
R116  3.57k  [SR0603]  24.79 92.33 180 bottom
R117  2.49k  [SR0603]  74.68 40.64 0 bottom
R118  1.15k  [SR0603]  24.79 93.73 0 bottom
R119  4.99k  [SR0603]  77.62 40.64 0 bottom
R120  100k  [SR0603]  78.56 42.55 0 top
R121  1k  [SR0603]  44.58 4.35 0 bottom
R122  150k  [SR0603]  33.86 4.35 0 bottom
R123  3.9k  [SR0603]  33.86 2.94 180 bottom
R124  1.21k  [SR0603]  33.88 11.97 0 bottom
R125  0  [SR0603]  33.88 13.38 180 bottom
R126  68k  [SR0603]  33.07 8.66 270 bottom
R127  13k  [SR0603]  34.49 8.66 90 bottom
R128  1k  [SR0603]  113.77 4.35 0 bottom
R129  150k  [SR0603]  103.1 4.35 0 bottom
R130  3.9k  [SR0603]  103.1 2.94 180 bottom
R131  0  [SR0603]  109.07 5.92 180 bottom
R132  2.37k  [SR0603]  103.1 11.97 0 bottom
R133  0  [SR0603]  103.1 13.38 180 bottom
R134  68k  [SR0603]  102.31 8.66 270 bottom
R135  13k  [SR0603]  103.73 8.66 90 bottom
R136  100k  [SR0603]  33.96 25 0 bottom
R137  100k  [SR0603]  33.96 26.39 0 bottom
R138  100k  [SR0603]  33.96 27.79 0 bottom
R139  100k  [SR0603]  36.32 28.57 270 bottom
R140  32.4k  [SR0603]  53.67 20.2 180 top
R141  14.3k  [SR0603]  124.69 19.2 180 bottom
R142  25.5k  [SR0603]  77.42 20.2 180 top
R143  65k  [SR0603]  34.41 19.56 90 bottom
R144  1k  [SR0603]  90.73 4.37 0 bottom
R145  150k  [SR0603]  79.98 4.37 0 bottom
R146  3.9k  [SR0603]  79.98 2.97 180 bottom
R148  6.98k  [SR0603]  80.01 11.99 0 bottom
R149  0  [SR0603]  80.01 13.41 180 bottom
R150  68k  [SR0603]  79.23 8.69 270 bottom
R151  13k  [SR0603]  80.64 8.69 90 bottom
R152  1k  [SR0603]  40.41 25.15 270 bottom
R153  1k  [SR0603]  67.67 4.35 0 bottom
R154  150k  [SR0603]  56.9 4.35 0 bottom
R155  3.9k  [SR0603]  56.9 2.94 180 bottom
R156  4.75k  [SR0603]  56.92 11.97 0 bottom
R157  0  [SR0603]  56.92 13.38 180 bottom
R158  68k  [SR0603]  56.21 8.66 270 bottom
R159  13k  [SR0603]  57.63 8.66 90 bottom
R160  10k  [SR0603]  43.56 23.98 0 bottom
R161  10k  [SR0603]  43.56 25.38 0 bottom
R162  10k  [SR0603]  43.56 26.77 0 bottom
R163  10k  [SR0603]  43.56 28.17 0 bottom
R164  1k  [SR0603]  136.86 4.32 0 bottom
R165  150k  [SR0603]  126.11 4.32 0 bottom
R166  3.9k  [SR0603]  126.11 2.92 180 bottom
R167  0  [SR0603]  132.56 5.84 180 bottom
R168  20.5k  [SR0603]  126.14 11.94 0 bottom
R169  0  [SR0603]  126.14 13.36 180 bottom
R170  68k  [SR0603]  125.38 8.64 270 bottom
R171  13k  [SR0603]  126.79 8.64 90 bottom
R172  4.7k  [SR0603]  117.17 26.85 0 bottom
R173  4.7k  [SR0603]  117.17 28.24 0 bottom
R174  4.7k  [SR0603]  117.17 31.04 0 bottom
R175  300  [SR0603]  127.13 39.29 270 bottom
R176  4.7k  [SR0603]  117.17 29.64 0 bottom
R177  300  [SR0603]  129.69 39.32 270 bottom
R178  4.7k  [SR0603]  117.17 25.45 0 bottom
R179  300  [SR0603]  132.31 39.32 270 bottom
R180  4.7k  [SR0603]  141.58 39.29 0 bottom
R181  4.7k  [SR0603]  141.58 41.83 0 bottom
R182  4.7k  [SR0603]  141.58 44.37 0 bottom
R183  510  [SR0603]  137.5 75.01 0 bottom
R184  10k  [SR0603]  131.66 76.17 180 bottom
R185  510  [SR0603]  132.7 67.94 0 bottom
R186  510  [SR0603]  132.22 69.77 0 bottom
R187  0  [SR0603]  137.51 73.58 180 bottom
R188  60k  [SR0603]  134.87 62.32 90 bottom
R189  10k  [SR0603]  110.76 56.54 0 bottom
R190  30k  [SR0603]  136.3 62.32 90 bottom
R191  1M  [SR0603]  141.75 55.45 0 bottom
R192  10k  [SR0603]  125.68 55.09 270 bottom
R193  2.2k  [SR0603]  121.96 60.93 0 bottom
R194  2.2k  [SR0603]  121.96 63.47 0 bottom
R200  100  [SC0402]  62.61 49.3 270 bottom
R300  100  [SR0603]  55.32 91.21 90 bottom
R301  100  [SR0603]  55.24 86.06 270 top
R302  100  [SR0603]  64.26 86.08 90 bottom
R303  100  [SR0603]  64.29 80.9 90 bottom
R304  500  [SR0603]  43.81 102.67 180 bottom
R305  500  [SR0603]  54.56 102.67 180 bottom
R900  100k  [SR0603]  21.56 38.02 270 bottom
SW1  Switch-6  [POWER_SW]  19.58 16.7 90 top
SW2  SW DIP3  [SWITCH-3P-DIP]  147.98 37.29 90 top
T1  AJ243_0  [CN1-DCJACK]  6.88 14.73 270 top
TP1  ADC_OTR  [TP_40MIL]  35.69 86.86 0 top
U1  DDR3_MT41J_2Gb_78ball  [DDR3-78BALL-DA]  59.78 26.26 0 top
U2  TPS51200DRCR  [SON-10]  79.2 27.02 180 top
U4  Oscillater  [OSC4-0705]  74.58 83.06 180 top
U8  SN74LVC1T45  [SN74LVC1T45-DBV]  15.8 31.06 90 bottom
U9  SN74LVC1T45  [SN74LVC1T45-DBV]  6.43 32.76 270 bottom
U10  SN74LVC1T45  [SN74LVC1T45-DBV]  26.24 31.14 90 bottom
U11  XC7A100TFGG484  [ARTIX-7-FGG484]  82.51 68.3 180 top
U12  N25Q128  [N25Q128-SF]  32.11 61.81 270 top
U13  88E1111-XX-RCJ1C000  [PQFP50P1720X2320-128R]  106.5 84.17 90 top
U14  FX10A-100P-10-SV-Receptacle  [FX10A-100P10-SV-RECEPTACLE]  3.17 72.8 270 top
U15  AD8293G160  [AD8293G160-SOT23]  15.95 79.29 90 top
U16  REF3025  [REF3025-SOT-23-3]  21.39 84.37 270 top
U17  ADG819  [ADG819-MSOP]  19.42 72.95 0 top
U18  AD9220  [AD9220-SSOP]  33.57 82.45 180 top
U19  TPS74401  [QFN65P500X500-21]  83.97 38.33 0 top
U20  -  [TPS74201-KTW]  8.38 93.27 0 top
U21  -  [TPS74201-KTW]  21.89 93.27 0 top
U22  TPS74401  [QFN65P500X500-21]  75.56 38.35 0 top
U23  PTH08T230W  [R-PDSS-T10_CZ]  39.19 10.7 180 top
U24  PTH08T230W  [R-PDSS-T10_CZ]  108.4 10.7 180 top
U25  PTH08T230W  [R-PDSS-T10_CZ]  85.34 10.72 180 top
U26  TPS386000  [TPS386000-VQFN]  40.61 23.9 90 top
U27  PTH08T230W  [R-PDSS-T10_CZ]  62.28 10.7 180 top
U28  PTH08T230W  [R-PDSS-T10_CZ]  131.47 10.67 180 top
U29  74441-0010  [LASER22-4816-M]  113.69 24.84 180 top
U30  CP2102_2  [QFN-28]  131.42 72.09 180 top
U31  CY7C68013A  [SOP56-25-300]  108.58 52.4 90 top
U32  TPS3820-33  [TPS3820-33-SOT23]  115.48 64.54 0 top
U33  24LC64  [DIP8-100-300]  123.52 59.66 90 top
U40  -  [SY58608U]  95.45 34.7 90 top
U41  SN65LVDS100  [SN65LVDS100-SOIC]  57.84 93.65 0 bottom
U42  SN65LVDS100  [SN65LVDS100-SOIC]  57.84 83.62 0 top
U43  SN65LVDS100  [SN65LVDS100-SOIC]  61.72 83.62 180 bottom
U44  SN65LVDS100  [SN65LVDS100-SOIC]  61.72 78.46 180 bottom
X1  Crystal-MA-506-EPSON  [CRYSTAL-MA-506]  103.02 97.36 0 top
Y1  24MHz  [XTAL2-200A]  123.39 47.07 270 top

## Library data of the parts
BT1-BT3 = Button
C1-C15 C18-C26 C31 C34 C37 C44-C54 C56-C63 C65-C72 C74-C81 C83-C90 C92-C99 C101-C105 C107-C112 C114 C115 C119-C132 C134-C152 C154-C176 C178-C192 C194 C195 C197-C201 C203 C204 C206-C208 C210 C211 C215-C217 C219 C222-C225 C229 C234 C235 C239 C240 C244-C247 C251 C252 C255-C258 C260 C261 C266 C268-C276 C279 C280 C300-C304 C306-C311 C400 C402 C404 C406 = Capacitor np
C16 C17 C27-C30 C32 C35 C55 C64 C73 C82 C91 C100 C106 C113 C118 C133 C153 C177 C193 C196 C202 C205 C209 C212-C214 C218 C220 C221 C226-C228 C230-C233 C236-C238 C241-C243 C248-C250 C253 C254 C259 C262 C263 C267 C305 C401 C403 C405 C407 = Capacitor pol
C264 C265 = CAP NP
C277 C278 = CAP POL
D1-D15 = LED
J1-J7 = LEMO
J8 = JTAG-14pin
J9 = USB_B_3
J10 = USB_B
JP1 JP2 = Jump wire
L1-L6 L10 = Inductor
LED1-LED4 = Diode-Light-emitt
OSC1 OSC2 = SiT9102
P1 P4 = RJ45-HFJ11-1G01E-L12RL
P2 = Pin 4
R1-R32 R34-R67 R69-R103 R111-R146 R148-R182 R189 R192-R194 R200 R300-R305 = Resistor
R33 R110 R183-R187 R900 = R
R68 R104-R109 R188 R190 R191 = RESISTOR
SW1 = Switch-6
SW2 = SW DIP3
T1 = AJ243_0
TP1 = T POINT A
U1 = DDR3_MT41J_2Gb_78ball
U2 = TPS51200DRCR_0
U4 = Oscillator_1
U8-U10 = SN74LVC1T45
U11 = XC7A100TFGG484
U12 = N25Q128
U13 = 88E1111-XX-RCJ1C000
U14 = FX10A-100P-10-SV-Receptacle
U15 = AD8293G160
U16 = REF3025
U17 = ADG819
U18 = AD9220
U19 U22 = TPS74401
U20 U21 = TPS742xx-KTW
U23-U25 U27 U28 = PTH04T230WAD
U26 = TPS386000
U29 = 74441-0010
U30 = CP2102_0
U31 = CY7C68013A_0
U32 = TPS3820-33
U33 = 24LC64
U40 = SY58608U
U41-U44 = SNLVDS100
X1 = Crystal-MA-506-EPSON
Y1 = Crystal

## Footprints (pads in the part's own frame, mm; a bottom-side part is the same pattern mirrored in y, then rotated)
AD8293G160-SOT23
  rect 0.75x0.38 smd: 1(-0.425,2.425) 2(-0.425,1.775) 3(-0.425,1.125) 4(-0.425,0.475) 5(2.025,0.475) 6(2.025,1.125) 7(2.025,1.775) 8(2.025,2.425)
AD9220-SSOP
  rect 1.05x0.38 smd: 1(-0.925,9.325) 2(-0.925,8.675) 3(-0.925,8.025) 4(-0.925,7.375) 5(-0.925,6.725) 6(-0.925,6.075) 7(-0.925,5.425) 8(-0.925,4.775) 9(-0.925,4.125) 10(-0.925,3.475) 11(-0.925,2.825) 12(-0.925,2.175) 13(-0.925,1.525) 14(-0.925,0.875) 15(6.225,0.875) 16(6.225,1.525) 17(6.225,2.175) 18(6.225,2.825) 19(6.225,3.475) 20(6.225,4.125) 21(6.225,4.775) 22(6.225,5.425) 23(6.225,6.075) 24(6.225,6.725) 25(6.225,7.375) 26(6.225,8.025) 27(6.225,8.675) 28(6.225,9.325)
ADG819-MSOP
  rect 0.85x0.4 smd: 1(-0.725,2.475) 2(-0.725,1.825) 3(-0.725,1.175) 4(-0.725,0.525) 5(3.725,0.525) 6(3.725,1.175) 7(3.725,1.825) 8(3.725,2.475)
ARTIX-7-FGG484
  round 0.508 smd: A1(1,22) A2(2,22) A3(3,22) A4(4,22) A5(5,22) A6(6,22) A7(7,22) A8(8,22) A9(9,22) A10(10,22) A11(11,22) A12(12,22) A13(13,22) A14(14,22) A15(15,22) A16(16,22) A17(17,22) A18(18,22) A19(19,22) A20(20,22) A21(21,22) A22(22,22) AA1(1,2) AA2(2,2) AA3(3,2) AA4(4,2) AA5(5,2) AA6(6,2) AA7(7,2) AA8(8,2) AA9(9,2) AA10(10,2) AA11(11,2) AA12(12,2) AA13(13,2) AA14(14,2) AA15(15,2) AA16(16,2) AA17(17,2) AA18(18,2) AA19(19,2) AA20(20,2) AA21(21,2) AA22(22,2) AB1(1,1) AB2(2,1) AB3(3,1) AB4(4,1) AB5(5,1) AB6(6,1) AB7(7,1) AB8(8,1) AB9(9,1) AB10(10,1) AB11(11,1) AB12(12,1) AB13(13,1) AB14(14,1) AB15(15,1) AB16(16,1) AB17(17,1) AB18(18,1) AB19(19,1) AB20(20,1) AB21(21,1) AB22(22,1) B1(1,21) B2(2,21) B3(3,21) B4(4,21) B5(5,21) B6(6,21) B7(7,21) B8(8,21) B9(9,21) B10(10,21) B11(11,21) B12(12,21) B13(13,21) B14(14,21) B15(15,21) B16(16,21) B17(17,21) B18(18,21) B19(19,21) B20(20,21) B21(21,21) B22(22,21) C1(1,20) C2(2,20) C3(3,20) C4(4,20) C5(5,20) C6(6,20) C7(7,20) C8(8,20) C9(9,20) C10(10,20) C11(11,20) C12(12,20) C13(13,20) C14(14,20) C15(15,20) C16(16,20) C17(17,20) C18(18,20) C19(19,20) C20(20,20) C21(21,20) C22(22,20) D1(1,19) D2(2,19) D3(3,19) D4(4,19) D5(5,19) D6(6,19) D7(7,19) D8(8,19) D9(9,19) D10(10,19) D11(11,19) D12(12,19) D13(13,19) D14(14,19) D15(15,19) D16(16,19) D17(17,19) D18(18,19) D19(19,19) D20(20,19) D21(21,19) D22(22,19) E1(1,18) E2(2,18) E3(3,18) E4(4,18) E5(5,18) E6(6,18) E7(7,18) E8(8,18) E9(9,18) E10(10,18) E11(11,18) E12(12,18) E13(13,18) E14(14,18) E15(15,18) E16(16,18) E17(17,18) E18(18,18) E19(19,18) E20(20,18) E21(21,18) E22(22,18) F1(1,17) F2(2,17) F3(3,17) F4(4,17) F5(5,17) F6(6,17) F7(7,17) F8(8,17) F9(9,17) F10(10,17) F11(11,17) F12(12,17) F13(13,17) F14(14,17) F15(15,17) F16(16,17) F17(17,17) F18(18,17) F19(19,17) F20(20,17) F21(21,17) F22(22,17) G1(1,16) G2(2,16) G3(3,16) G4(4,16) G5(5,16) G6(6,16) G7(7,16) G8(8,16) G9(9,16) G10(10,16) G11(11,16) G12(12,16) G13(13,16) G14(14,16) G15(15,16) G16(16,16) G17(17,16) G18(18,16) G19(19,16) G20(20,16) G21(21,16) G22(22,16) H1(1,15) H2(2,15) H3(3,15) H4(4,15) H5(5,15) H6(6,15) H7(7,15) H8(8,15) H9(9,15) H10(10,15) H11(11,15) H12(12,15) H13(13,15) H14(14,15) H15(15,15) H16(16,15) H17(17,15) H18(18,15) H19(19,15) H20(20,15) H21(21,15) H22(22,15) J1(1,14) J2(2,14) J3(3,14) J4(4,14) J5(5,14) J6(6,14) J7(7,14) J8(8,14) J9(9,14) J10(10,14) J11(11,14) J12(12,14) J13(13,14) J14(14,14) J15(15,14) J16(16,14) J17(17,14) J18(18,14) J19(19,14) J20(20,14) J21(21,14) J22(22,14) K1(1,13) K2(2,13) K3(3,13) K4(4,13) K5(5,13) K6(6,13) K7(7,13) K8(8,13) K9(9,13) K10(10,13) K11(11,13) K12(12,13) K13(13,13) K14(14,13) K15(15,13) K16(16,13) K17(17,13) K18(18,13) K19(19,13) K20(20,13) K21(21,13) K22(22,13) L1(1,12) L2(2,12) L3(3,12) L4(4,12) L5(5,12) L6(6,12) L7(7,12) L8(8,12) L9(9,12) L10(10,12) L11(11,12) L12(12,12) L13(13,12) L14(14,12) L15(15,12) L16(16,12) L17(17,12) L18(18,12) L19(19,12) L20(20,12) L21(21,12) L22(22,12) M1(1,11) M2(2,11) M3(3,11) M4(4,11) M5(5,11) M6(6,11) M7(7,11) M8(8,11) M9(9,11) M10(10,11) M11(11,11) M12(12,11) M13(13,11) M14(14,11) M15(15,11) M16(16,11) M17(17,11) M18(18,11) M19(19,11) M20(20,11) M21(21,11) M22(22,11) N1(1,10) N2(2,10) N3(3,10) N4(4,10) N5(5,10) N6(6,10) N7(7,10) N8(8,10) N9(9,10) N10(10,10) N11(11,10) N12(12,10) N13(13,10) N14(14,10) N15(15,10) N16(16,10) N17(17,10) N18(18,10) N19(19,10) N20(20,10) N21(21,10) N22(22,10) P1(1,9) P2(2,9) P3(3,9) P4(4,9) P5(5,9) P6(6,9) P7(7,9) P8(8,9) P9(9,9) P10(10,9) P11(11,9) P12(12,9) P13(13,9) P14(14,9) P15(15,9) P16(16,9) P17(17,9) P18(18,9) P19(19,9) P20(20,9) P21(21,9) P22(22,9) R1(1,8) R2(2,8) R3(3,8) R4(4,8) R5(5,8) R6(6,8) R7(7,8) R8(8,8) R9(9,8) R10(10,8) R11(11,8) R12(12,8) R13(13,8) R14(14,8) R15(15,8) R16(16,8) R17(17,8) R18(18,8) R19(19,8) R20(20,8) R21(21,8) R22(22,8) T1(1,7) T2(2,7) T3(3,7) T4(4,7) T5(5,7) T6(6,7) T7(7,7) T8(8,7) T9(9,7) T10(10,7) T11(11,7) T12(12,7) T13(13,7) T14(14,7) T15(15,7) T16(16,7) T17(17,7) T18(18,7) T19(19,7) T20(20,7) T21(21,7) T22(22,7) U1(1,6) U2(2,6) U3(3,6) U4(4,6) U5(5,6) U6(6,6) U7(7,6) U8(8,6) U9(9,6) U10(10,6) U11(11,6) U12(12,6) U13(13,6) U14(14,6) U15(15,6) U16(16,6) U17(17,6) U18(18,6) U19(19,6) U20(20,6) U21(21,6) U22(22,6) V1(1,5) V2(2,5) V3(3,5) V4(4,5) V5(5,5) V6(6,5) V7(7,5) V8(8,5) V9(9,5) V10(10,5) V11(11,5) V12(12,5) V13(13,5) V14(14,5) V15(15,5) V16(16,5) V17(17,5) V18(18,5) V19(19,5) V20(20,5) V21(21,5) V22(22,5) W1(1,4) W2(2,4) W3(3,4) W4(4,4) W5(5,4) W6(6,4) W7(7,4) W8(8,4) W9(9,4) W10(10,4) W11(11,4) W12(12,4) W13(13,4) W14(14,4) W15(15,4) W16(16,4) W17(17,4) W18(18,4) W19(19,4) W20(20,4) W21(21,4) W22(22,4) Y1(1,3) Y2(2,3) Y3(3,3) Y4(4,3) Y5(5,3) Y6(6,3) Y7(7,3) Y8(8,3) Y9(9,3) Y10(10,3) Y11(11,3) Y12(12,3) Y13(13,3) Y14(14,3) Y15(15,3) Y16(16,3) Y17(17,3) Y18(18,3) Y19(19,3) Y20(20,3) Y21(21,3) Y22(22,3)
BL02RN2R1M2B
  rect 1.397x1.397 hole 0.635: 1(-2.54,0) 2(2.54,0)
CN1-DCJACK
  rect 3.556x2.032 hole 2.6x0.8: 1(0,0) 3(0,6.1)
  rect 2.032x3.556 hole 0.8x2.6: 2(4.5,2.997)
CON-BNC-S-T
  round 2.54 hole 1.524: 1(0,0) 2(2.54,-2.54) 3(2.54,2.54) 4(-2.54,2.54) 5(-2.54,-2.54)
CONN_USB_B
  round 0.94 hole 0.94 unplated: (-2.2,1.445) (2.2,1.445)
  rect 0.508x2.032 smd: 1(-1.6,4.045) 2(-0.8,4.045) 3(0,4.045) 4(0.8,4.045) 5(1.6,4.045)
  rect 2.489x2.184 smd: 6(4.2,3.795) 7(4.2,-1.505) 8(-4.2,-1.505) 9(-4.2,3.795)
CRYSTAL-MA-506
  rect 4.1x2.05 smd: 1(2.05,1.025) 2(13.15,1.025) 3(13.15,4.575) 4(2.05,4.575)
DDR3-78BALL-DA
  round 0.35 smd: A1(0.8,10.05) A2(1.6,10.05) A3(2.4,10.05) A7(5.6,10.05) A8(6.4,10.05) A9(7.2,10.05) B1(0.8,9.25) B2(1.6,9.25) B3(2.4,9.25) B7(5.6,9.25) B8(6.4,9.25) B9(7.2,9.25) C1(0.8,8.45) C2(1.6,8.45) C3(2.4,8.45) C7(5.6,8.45) C8(6.4,8.45) C9(7.2,8.45) D1(0.8,7.65) D2(1.6,7.65) D3(2.4,7.65) D7(5.6,7.65) D8(6.4,7.65) D9(7.2,7.65) E1(0.8,6.85) E2(1.6,6.85) E3(2.4,6.85) E7(5.6,6.85) E8(6.4,6.85) E9(7.2,6.85) F1(0.8,6.05) F2(1.6,6.05) F3(2.4,6.05) F7(5.6,6.05) F8(6.4,6.05) F9(7.2,6.05) G1(0.8,5.25) G2(1.6,5.25) G3(2.4,5.25) G7(5.6,5.25) G8(6.4,5.25) G9(7.2,5.25) H1(0.8,4.45) H2(1.6,4.45) H3(2.4,4.45) H7(5.6,4.45) H8(6.4,4.45) H9(7.2,4.45) J1(0.8,3.65) J2(1.6,3.65) J3(2.4,3.65) J7(5.6,3.65) J8(6.4,3.65) J9(7.2,3.65) K1(0.8,2.85) K2(1.6,2.85) K3(2.4,2.85) K7(5.6,2.85) K8(6.4,2.85) K9(7.2,2.85) L1(0.8,2.05) L2(1.6,2.05) L3(2.4,2.05) L7(5.6,2.05) L8(6.4,2.05) L9(7.2,2.05) M1(0.8,1.25) M2(1.6,1.25) M3(2.4,1.25) M7(5.6,1.25) M8(6.4,1.25) M9(7.2,1.25) N1(0.8,0.45) N2(1.6,0.45) N3(2.4,0.45) N7(5.6,0.45) N8(6.4,0.45) N9(7.2,0.45)
DIP8-100-300
  rect 1.524x1.524 hole 0.914: 1(-3.81,-3.81)
  round 1.524 hole 0.914: 2(-1.27,-3.81) 3(1.27,-3.81) 4(3.81,-3.81) 5(3.81,3.81) 6(1.27,3.81) 7(-1.27,3.81) 8(-3.81,3.81)
FX10A-100P10-SV-RECEPTACLE
  round 1.2 hole 1.2 unplated: (2.55,3.85) (34.95,3.85)
  rect 0.3x1.6 smd: 1(4,0.8) 2(4,6.9) 3(4.5,0.8) 4(4.5,6.9) 5(5,0.8) 6(5,6.9) 7(5.5,0.8) 8(5.5,6.9) 9(6,0.8) 10(6,6.9) 13(7.5,0.8) 14(7.5,6.9) 15(8,0.8) 16(8,6.9) 17(8.5,0.8) 18(8.5,6.9) 19(9,0.8) 20(9,6.9) 21(9.5,0.8) 22(9.5,6.9) 23(10,0.8) 24(10,6.9) 25(10.5,0.8) 26(10.5,6.9) 27(11,0.8) 28(11,6.9) 29(11.5,0.8) 30(11.5,6.9) 31(12,0.8) 32(12,6.9) 35(13.5,0.8) 36(13.5,6.9) 37(14,0.8) 38(14,6.9) 39(14.5,0.8) 40(14.5,6.9) 41(15,0.8) 42(15,6.9) 43(15.5,0.8) 44(15.5,6.9) 45(16,0.8) 46(16,6.9) 47(16.5,0.8) 48(16.5,6.9) 49(17,0.8) 50(17,6.9) 51(17.5,0.8) 52(17.5,6.9) 53(18,0.8) 54(18,6.9) 57(19.5,0.8) 58(19.5,6.9) 59(20,0.8) 60(20,6.9) 61(20.5,0.8) 62(20.5,6.9) 63(21,0.8) 64(21,6.9) 65(21.5,0.8) 66(21.5,6.9) 67(22,0.8) 68(22,6.9) 69(22.5,0.8) 70(22.5,6.9) 71(23,0.8) 72(23,6.9) 73(23.5,0.8) 74(23.5,6.9) 75(24,0.8) 76(24,6.9) 79(25.5,0.8) 80(25.5,6.9) 81(26,0.8) 82(26,6.9) 83(26.5,0.8) 84(26.5,6.9) 85(27,0.8) 86(27,6.9) 87(27.5,0.8) 88(27.5,6.9) 89(28,0.8) 90(28,6.9) 91(28.5,0.8) 92(28.5,6.9) 93(29,0.8) 94(29,6.9) 95(29.5,0.8) 96(29.5,6.9) 97(30,0.8) 98(30,6.9) 101(31.5,0.8) 102(31.5,6.9) 103(32,0.8) 104(32,6.9) 105(32.5,0.8) 106(32.5,6.9) 107(33,0.8) 108(33,6.9) 109(33.5,0.8) 110(33.5,6.9)
  rect 0.7x1.6 smd: 11(6.75,0.8) 12(6.75,6.9) 33(12.75,0.8) 34(12.75,6.9) 55(18.75,0.8) 56(18.75,6.9) 77(24.75,0.8) 78(24.75,6.9) 99(30.75,0.8) 100(30.75,6.9)
  rect 1.6x3.1 smd: B1(0.8,3.85) B2(36.7,3.85)
INDC2-200-M
  round 2.286 hole 1.397: 1(-2.54,0) 2(2.54,0)
JTAG-14P
  rect 1.397x1.397 hole 1.016: 1(5.131,3.226)
  round 1.397 hole 1.016: 2(5.131,5.766) 3(7.671,3.226) 4(7.671,5.766) 5(10.211,3.226) 6(10.211,5.766) 7(12.751,3.226) 8(12.751,5.766) 9(15.291,3.226) 10(15.291,5.766) 11(17.831,3.226) 12(17.831,5.766) 13(20.371,3.226) 14(20.371,5.766)
LASER22-4816-M
  round 1.016 hole 1.016 unplated: (-3.988,3.734) (-3.988,-10.516) (0.711,3.734) (0.711,-10.516) (5.69,3.734) (5.69,-10.516) (10.312,1.397) (10.312,-3.404) (10.312,-8.204)
  round 1.778 hole 1.778 unplated: (4.089,1.397) (4.089,-8.204)
  rect 2.54x0.508 smd: 1(0,0) 2(0,-0.813) 3(0,-1.6) 4(0,-2.388) 5(0,-3.2) 6(0,-3.988) 7(0,-4.801) 8(0,-5.588) 9(0,-6.401) 10(0,-7.188) 11(8.204,-6.807) 12(8.204,-5.994) 13(8.204,-5.207) 14(8.204,-4.394) 15(8.204,-3.607) 16(8.204,-2.794) 17(8.204,-2.007) 18(8.204,-1.194) 19(8.204,-0.406) 20(8.204,0.406)
  rect 2.032x2.032 hole 1.27: 23(-21.311,-10.516) 24(-11.303,-10.516) 26(-1.803,-10.516) 29(8.204,-10.516) 37(-6.807,3.734) 38(-16.307,3.734) 39(-26.289,3.734) 40(-26.391,-4.851) 41(-6.807,-7.341) 42(-6.807,-1.956)
  rect 2.032x2.032 hole 1.016: 34(3.2,3.734)
MJ4-SR-1
  round 1.397 hole 0.914: 1(0,0) 2(-2.489,0) 3(-2.489,-1.981) 4(0,-1.981)
  round 3.556 hole 2.54: 5(-7.264,-4.699) 6(4.775,-4.699)
N25Q128-SF
  rect 1.168x0.508 smd: 1(-1.054,9.601) 2(-1.054,8.331) 3(-1.054,7.061) 4(-1.054,5.791) 5(-1.054,4.521) 6(-1.054,3.251) 7(-1.054,1.981) 8(-1.054,0.711) 9(8.547,0.711) 10(8.547,1.981) 11(8.547,3.251) 12(8.547,4.521) 13(8.547,5.791) 14(8.547,7.061) 15(8.547,8.331) 16(8.547,9.601)
OSC4-0705
  rect 1.778x2.032 smd: 1(-2.54,-2.101) 2(2.54,-2.101) 3(2.54,2.101) 4(-2.54,2.101)
POWER_SW
  round 1.8 hole 1: 1(-5.5,2.5) 2(-5.5,0) 3(-5.5,-2.5) 4(0,2.5) 5(0,0) 6(0,-2.5)
PQFP50P1720X2320-128R
  round 1 smd: (-8.25,-11.25) (8.25,11.25)
  rect 1.6x0.3 smd: 1(-8.25,9.25) 2(-8.25,8.75) 3(-8.25,8.25) 4(-8.25,7.75) 5(-8.25,7.25) 6(-8.25,6.75) 7(-8.25,6.25) 8(-8.25,5.75) 9(-8.25,5.25) 10(-8.25,4.75) 11(-8.25,4.25) 12(-8.25,3.75) 13(-8.25,3.25) 14(-8.25,2.75) 15(-8.25,2.25) 16(-8.25,1.75) 17(-8.25,1.25) 18(-8.25,0.75) 19(-8.25,0.25) 20(-8.25,-0.25) 21(-8.25,-0.75) 22(-8.25,-1.25) 23(-8.25,-1.75) 24(-8.25,-2.25) 25(-8.25,-2.75) 26(-8.25,-3.25) 27(-8.25,-3.75) 28(-8.25,-4.25) 29(-8.25,-4.75) 30(-8.25,-5.25) 31(-8.25,-5.75) 32(-8.25,-6.25) 33(-8.25,-6.75) 34(-8.25,-7.25) 35(-8.25,-7.75) 36(-8.25,-8.25) 37(-8.25,-8.75) 38(-8.25,-9.25) 65(8.25,-9.25) 66(8.25,-8.75) 67(8.25,-8.25) 68(8.25,-7.75) 69(8.25,-7.25) 70(8.25,-6.75) 71(8.25,-6.25) 72(8.25,-5.75) 73(8.25,-5.25) 74(8.25,-4.75) 75(8.25,-4.25) 76(8.25,-3.75) 77(8.25,-3.25) 78(8.25,-2.75) 79(8.25,-2.25) 80(8.25,-1.75) 81(8.25,-1.25) 82(8.25,-0.75) 83(8.25,-0.25) 84(8.25,0.25) 85(8.25,0.75) 86(8.25,1.25) 87(8.25,1.75) 88(8.25,2.25) 89(8.25,2.75) 90(8.25,3.25) 91(8.25,3.75) 92(8.25,4.25) 93(8.25,4.75) 94(8.25,5.25) 95(8.25,5.75) 96(8.25,6.25) 97(8.25,6.75) 98(8.25,7.25) 99(8.25,7.75) 100(8.25,8.25) 101(8.25,8.75) 102(8.25,9.25)
  rect 0.3x1.6 smd: 39(-6.25,-11.25) 40(-5.75,-11.25) 41(-5.25,-11.25) 42(-4.75,-11.25) 43(-4.25,-11.25) 44(-3.75,-11.25) 45(-3.25,-11.25) 46(-2.75,-11.25) 47(-2.25,-11.25) 48(-1.75,-11.25) 49(-1.25,-11.25) 50(-0.75,-11.25) 51(-0.25,-11.25) 52(0.25,-11.25) 53(0.75,-11.25) 54(1.25,-11.25) 55(1.75,-11.25) 56(2.25,-11.25) 57(2.75,-11.25) 58(3.25,-11.25) 59(3.75,-11.25) 60(4.25,-11.25) 61(4.75,-11.25) 62(5.25,-11.25) 63(5.75,-11.25) 64(6.25,-11.25) 103(6.25,11.25) 104(5.75,11.25) 105(5.25,11.25) 106(4.75,11.25) 107(4.25,11.25) 108(3.75,11.25) 109(3.25,11.25) 110(2.75,11.25) 111(2.25,11.25) 112(1.75,11.25) 113(1.25,11.25) 114(0.75,11.25) 115(0.25,11.25) 116(-0.25,11.25) 117(-0.75,11.25) 118(-1.25,11.25) 119(-1.75,11.25) 120(-2.25,11.25) 121(-2.75,11.25) 122(-3.25,11.25) 123(-3.75,11.25) 124(-4.25,11.25) 125(-4.75,11.25) 126(-5.25,11.25) 127(-5.75,11.25) 128(-6.25,11.25)
QFN65P500X500-21
  rect 1.05x0.35 smd: 1(-2.35,1.3) 2(-2.35,0.65) 3(-2.35,0) 4(-2.35,-0.65) 5(-2.35,-1.3) 11(2.35,-1.3) 12(2.35,-0.65) 13(2.35,0) 14(2.35,0.65) 15(2.35,1.3)
  rect 0.35x1.05 smd: 6(-1.3,-2.35) 7(-0.65,-2.35) 8(0,-2.35) 9(0.65,-2.35) 10(1.3,-2.35) 16(1.3,2.35) 17(0.65,2.35) 18(0,2.35) 19(-0.65,2.35) 20(-1.3,2.35)
  rect 3x3 smd: 21(0,0)
QFN-28
  rect 1x0.3 smd: 1(-2.43,1.5) 2(-2.43,1) 3(-2.43,0.5) 4(-2.43,0) 5(-2.43,-0.5) 6(-2.43,-1) 7(-2.43,-1.5) 15(2.43,-1.5) 16(2.43,-1) 17(2.43,-0.5) 18(2.43,0) 19(2.43,0.5) 20(2.43,1) 21(2.43,1.5)
  rect 0.3x1 smd: 8(-1.5,-2.43) 9(-1,-2.43) 10(-0.5,-2.43) 11(0,-2.43) 12(0.5,-2.43) 13(1,-2.43) 14(1.5,-2.43) 22(1.5,2.43) 23(1,2.43) 24(0.5,2.43) 25(0,2.43) 26(-0.5,2.43) 27(-1,2.43) 28(-1.5,2.43)
  rect 3.15x3.15 smd: 29(0,0)
  rect 0.508x0.508 smd: 30(-2.134,2.134)
R-PDSS-T10_CZ
  rrect 1.905x1.905 hole 1.397: 1(-7.935,6.35)
  round 2.032 hole 1.397: 2(-7.935,1.27) 3(-7.935,-6.35) 4(4.765,-6.35) 5(7.935,-6.35) 6(7.935,-3.81) 7(7.935,-1.27) 8(7.935,1.27) 9(7.935,3.81) 10(7.935,6.35)
REF3025-SOT-23-3
  rect 0.61x1.067 smd: 1(0,0) 2(1.9,0) 3(0.95,2.37)
RJ45-HFJ11-1G01E-L12RL
  round 3.1 hole 3.25 unplated: (-11.43,0) (0,0)
  round 1.524 hole 0.889: 1(-11.43,8.89) 2(-10.16,6.35) 3(-8.89,8.89) 4(-7.62,6.35) 5(-6.35,8.89) 6(-5.08,6.35) 7(-3.81,8.89) 8(-2.54,6.35) 9(-1.27,8.89) 10(0,6.35)
  round 1.524 hole 1.016: 11(-12.344,-4.064) 12(-9.804,-4.064) 13(-1.626,-4.064) 14(0.914,-4.064)
  round 2.5 hole 1.6: 15(-13.462,3.048) 16(2.032,3.048)
SC0402
  rect 0.635x0.508 smd: 1(-0.508,0) 2(0.508,0)
SC0603
  rect 0.813x0.889 smd: 1(-0.762,0) 2(0.762,0)
SD0805
  rect 1.016x1.27 smd: 1(-1.143,0) 2(1.143,0)
SIP-2P
  rect 1.397x1.397 hole 0.914: 1(-1.27,0)
  round 1.397 hole 0.914: 2(1.27,0)
SIP-4P-156
  rect 2.794x2.794 hole 1.778: 1(-5.944,0)
  round 2.794 hole 1.778: 2(-1.981,0) 3(1.981,0) 4(5.944,0)
SL1206
  rect 1.397x1.651 smd: 1(-1.397,0) 2(1.397,0)
SL1812
  rect 1.524x3.175 smd: 1(-2.286,0) 2(2.286,0)
SN65LVDS100-SOIC
  rect 1.55x0.6 smd: 1(-0.75,4.355) 2(-0.75,3.085) 3(-0.75,1.815) 4(-0.75,0.545) 5(4.65,0.545) 6(4.65,1.815) 7(4.65,3.085) 8(4.65,4.355)
SN74LVC1T45-DBV
  rect 1.05x0.6 smd: 1(-0.533,2.4) 2(-0.533,1.45) 3(-0.533,0.5) 4(2.134,0.5) 5(2.134,1.45) 6(2.134,2.4)
SON-10
  custom 0.279x0.838 smd: 1(-1,-1.475) 2(-0.5,-1.475) 3(0,-1.475) 4(0.5,-1.475) 5(1,-1.475) 6(1,1.475) 7(0.5,1.475) 8(0,1.475) 9(-0.5,1.475) 10(-1,1.475)
  custom 3.8x1.65 smd: 11(0,0)
SOP56-25-300
  rect 0.305x1.778 smd: 1(-8.572,-4.953) 2(-7.938,-4.953) 3(-7.303,-4.953) 4(-6.668,-4.953) 5(-6.032,-4.953) 6(-5.397,-4.953) 7(-4.763,-4.953) 8(-4.128,-4.953) 9(-3.493,-4.953) 10(-2.857,-4.953) 11(-2.223,-4.953) 12(-1.587,-4.953) 13(-0.953,-4.953) 14(-0.318,-4.953) 15(0.318,-4.953) 16(0.953,-4.953) 17(1.587,-4.953) 18(2.223,-4.953) 19(2.857,-4.953) 20(3.493,-4.953) 21(4.128,-4.953) 22(4.763,-4.953) 23(5.397,-4.953) 24(6.032,-4.953) 25(6.668,-4.953) 26(7.303,-4.953) 27(7.938,-4.953) 28(8.572,-4.953) 29(8.572,4.953) 30(7.938,4.953) 31(7.303,4.953) 32(6.668,4.953) 33(6.032,4.953) 34(5.397,4.953) 35(4.763,4.953) 36(4.128,4.953) 37(3.493,4.953) 38(2.857,4.953) 39(2.223,4.953) 40(1.587,4.953) 41(0.953,4.953) 42(0.318,4.953) 43(-0.318,4.953) 44(-0.953,4.953) 45(-1.587,4.953) 46(-2.223,4.953) 47(-2.857,4.953) 48(-3.493,4.953) 49(-4.128,4.953) 50(-4.763,4.953) 51(-5.397,4.953) 52(-6.032,4.953) 53(-6.668,4.953) 54(-7.303,4.953) 55(-7.938,4.953) 56(-8.572,4.953)
SR0603
  rect 0.762x0.813 smd: 1(-0.762,0) 2(0.762,0)
SR2010
  rect 1.524x2.54 smd: 1(-2.667,0) 2(2.667,0)
STC3528
  rect 2.032x2.286 smd: 1(-1.651,0) 2(1.651,0)
STC7343
  rect 3.302x2.413 smd: 1(-3.175,0) 2(3.175,0)
SWITCH-3P-DIP
  round 1.397 hole 1.016: 1(2.007,0.991) 2(4.547,0.991) 3(7.087,0.991) 4(7.087,8.611) 5(4.547,8.611) 6(2.007,8.611)
SY58608U
  rect 0.65x0.3 smd: 1(0.075,2.25) 2(0.075,1.75) 3(0.075,1.25) 4(0.075,0.75) 9(2.925,0.75) 10(2.925,1.25) 11(2.925,1.75) 12(2.925,2.25)
  rect 0.3x0.65 smd: 5(0.75,0.075) 6(1.25,0.075) 7(1.75,0.075) 8(2.25,0.075) 13(2.25,2.925) 14(1.75,2.925) 15(1.25,2.925) 16(0.75,2.925)
  rect 1.55x1.55 smd: 17(1.5,1.5)
TP_40MIL
  round 1.397 hole 1.016: 1(0,0)
TPS3820-33-SOT23
  rect 0.61x1.067 smd: 1(0.498,-0.559) 2(1.448,-0.559) 3(2.398,-0.559) 4(2.398,2.159) 5(0.498,2.159)
TPS74201-KTW
  rect 0.864x3.556 smd: 1(1.245,-4.064) 2(2.515,-4.064) 3(3.785,-4.064) 4(5.055,-4.064) 5(6.325,-4.064) 6(7.595,-4.064) 7(8.865,-4.064)
  custom 10.109x7.722 smd: 8(1.245,2.718)
TPS386000-VQFN
  rect 1x0.28 smd: 1(0.1,3) 2(0.1,2.5) 3(0.1,2) 4(0.1,1.5) 5(0.1,1) 11(3.9,1) 12(3.9,1.5) 13(3.9,2) 14(3.9,2.5) 15(3.9,3)
  rect 0.28x1 smd: 6(1,0.1) 7(1.5,0.1) 8(2,0.1) 9(2.5,0.1) 10(3,0.1) 16(3,3.9) 17(2.5,3.9) 18(2,3.9) 19(1.5,3.9) 20(1,3.9)
  rect 2.15x2.15 smd: 21(2,2)
unnamed#2
  round 3.2 hole 3.2 unplated: (0,0)
XO75L
  rect 1.6x1.499 smd: 1(-2.54,-1.956) 2(0,-1.956) 3(2.54,-1.956) 4(2.54,1.956) 5(0,1.956) 6(-2.54,1.956)
XTAL2-200A
  round 1.27 hole 0.813: 1(-2.54,0) 2(2.54,0)

## Nets
2.5V_REF: C191.1 JP1.2 R106.1 U16.2(OUT)
